# Allegro board PCB_nou.brd
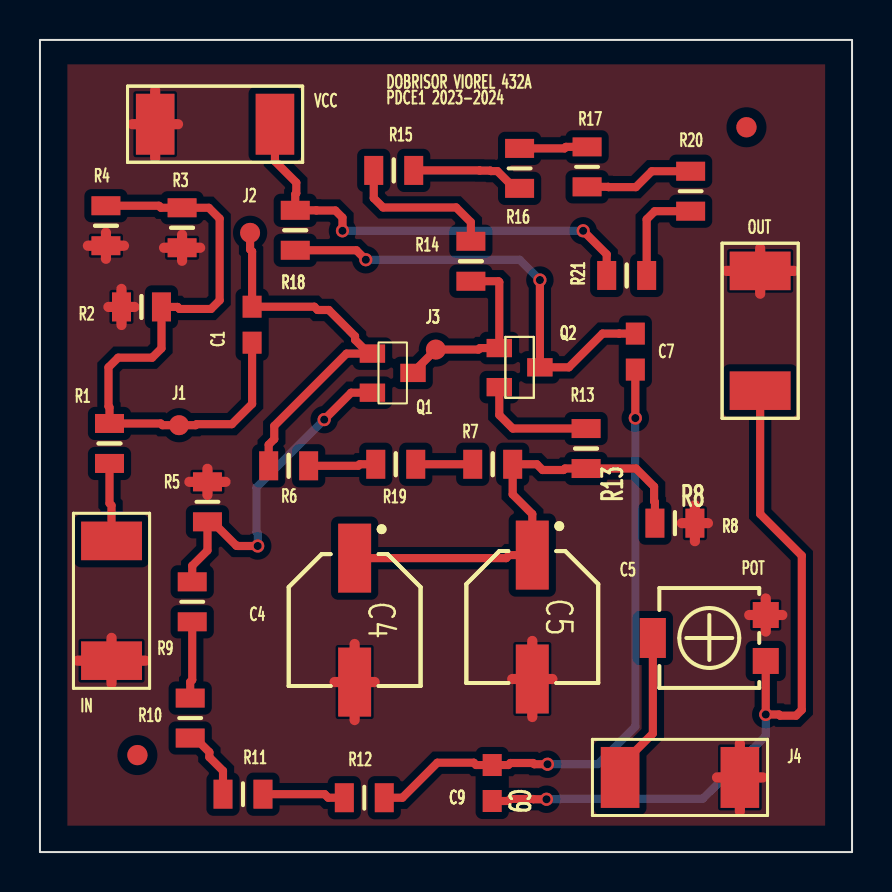
[diagram p0: board, top side]
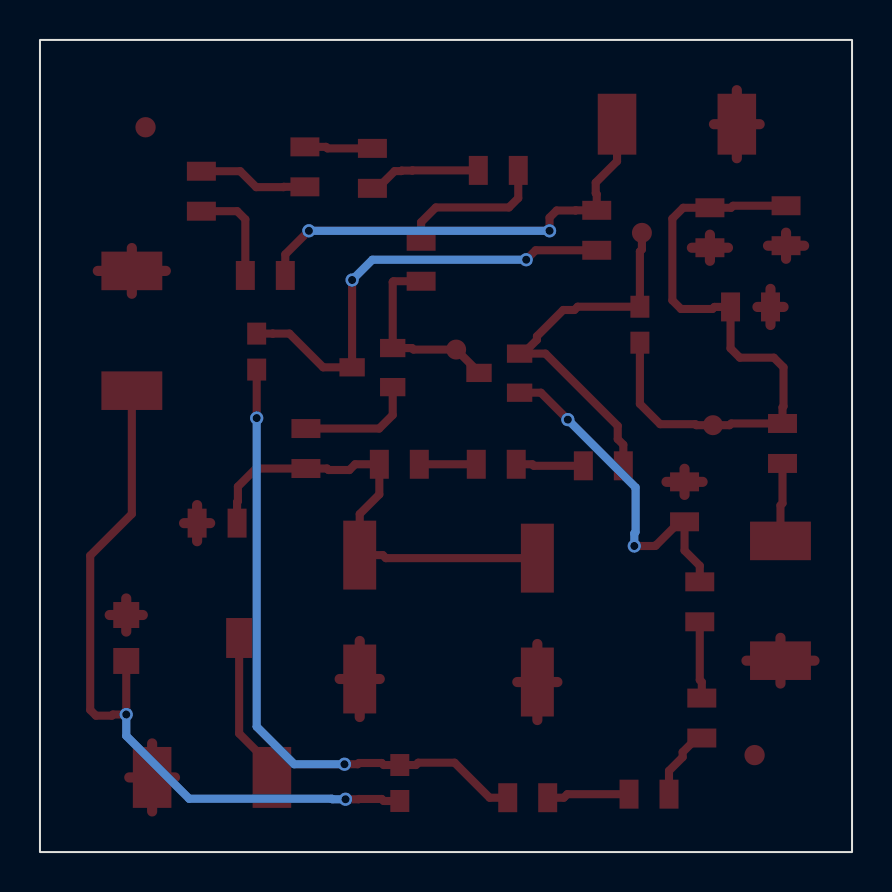
[diagram p1: board, bottom side, seen from below]

Outline 40.64 x 40.64 mm; copper layers: TOP, BOTTOM. Coordinates in mm from the lower left corner of the outline.
Outline path: rectangle 0,0 40.64,40.64

## Design rules (mm)
nets with their own width: min track width 0.406; nets N30981 N30987 N30993 N30999 N31005 N31059 N31085 N31131 N31145 N31155 N31195 N31227 N31257 N31261 N31407 N31419 N31451 N31457 N31481 N31959 N31965 N31971
nets with their own width: min track width 0.508; nets GND

## Placement (name value [footprint] x y rotation side)
C1  4.7u  [CAPC2008X126N_0805]  10.62 26.39 90 top
C4  10u  [CAPAE660X770N]  15.75 11.61 270 top
C5  10u  [CAPAE660X770N]  24.64 11.76 270 top
C7  4.7u  [CAPC2008X126N_0805]  29.79 25.04 90 top
C9  4.7u  [CAPC2008X126N_0805]  22.63 3.45 270 top
IN  CON2  [SMR2512]  3.58 9.58 90 top
J1  CON1  [TP100]  6.96 21.36 0 top
J2  CON1  [TP100]  10.52 30.99 0 top
J3  CON1  [TP100]  19.81 25.15 0 top
J4  CON2  [SMR2512]  29.03 3.73 0 top
NOREF  -  [unnamed]  35.36 36.27 0 top
NOREF#2  -  [unnamed]  4.88 4.85 0 top
OUT  CON2  [SMR2512]  36.04 23.09 90 top
POT  50k  [TS53YL]  36.32 11.86 0 top
Q1  BC846B  [TO236]  16.76 24.94 180 top
Q2  BC846B  [TO236]  23.11 25.22 180 top
R1  1000k  [RES2012X50N_0805]  3.48 20.45 270 top
R2  15k  [RES2012X50N_0805]  5.08 27.28 0 top
R3  100k  [RES2012X50N_0805]  7.11 31.24 90 top
R4  100k  [RES2012X50N_0805]  3.3 31.34 90 top
R5  1k  [RES2012X50N_0805]  8.38 17.53 270 top
R6  330k  [RES2012X50N_0805]  12.45 19.33 0 top
R7  15k  [RES2012X50N_0805]  22.66 19.41 0 top
R8  1k  [RES2012X50N_0805]  31.78 16.46 0 top
R9  100k  [RES2012X50N_0805]  7.62 12.52 270 top
R10  10k  [RES2012X50N_0805]  7.52 6.71 270 top
R11  100k  [RES2012X50N_0805]  10.16 2.9 0 top
R12  10k  [RES2012X50N_0805]  16.23 2.72 0 top
R13  1  [RES2012X50N_0805]  27.33 20.19 90 top
R14  47k  [RES2012X50N_0805]  21.56 29.57 90 top
R15  47k  [RES2012X50N_0805]  17.7 34.11 0 top
R16  47k  [RES2012X50N_0805]  24 34.21 270 top
R17  47k  [RES2012X50N_0805]  27.38 34.29 90 top
R18  15k  [RES2012X50N_0805]  12.78 31.11 90 top
R19  15k  [RES2012X50N_0805]  17.81 19.41 0 top
R20  10k  [RES2012X50N_0805]  32.56 33.07 90 top
R21  2k  [RES2012X50N_0805]  29.36 28.85 0 top
VCC  CON2  [SMR2512]  11.76 36.42 180 top

## Library data of the parts
C1 C4 C5 C7 C9 = C
IN J4 OUT VCC = CON2
J1-J3 = CON1
POT = POT
Q1 Q2 = BC846B
R1-R21 = R

## Footprints (pads in the part's own frame, mm; a bottom-side part is the same pattern mirrored in y, then rotated)
CAPAE660X770N
  rect 3.45x1.65 smd: 1(-3.1,0) 2(3.1,0)
CAPC2008X126N_0805
  rect 1.1x0.95 smd: 1(-0.9,0) 2(0.9,0)
RES2012X50N_0805
  rect 0.95x1.45 smd: 1(-1,0) 2(1,0)
SMR2512
  rect 1.93x3.048 smd: 1(0,0) 2(5.994,0)
TO236
  rect 1.27x0.914 smd: 1(0.127,0) 2(0.127,1.956) 3(-1.905,0.965)
TP100
  round 1 smd: 1(0,0)
TS53YL
  rect 1.3x1.3 smd: 1(0,0) 3(0,-2.3)
  rect 1.3x2 smd: 2(-5.65,-1.15)
unnamed
  round 1.016 smd: (0,0)

## Nets
GND: C4.2 C5.2 IN.1 J4.2 OUT.2 POT.1 R2.1 R3.1 R4.1 R5.1 R8.2 VCC.2
N30981: R15.2 R16.2
N30987: R16.1 R17.2
N30993: R17.1 R20.2
N30999: R20.1 R21.2
N31005: R18.2 R21.1 VCC.1
N31059: R14.2 R15.1
N31085: C7.2 Q2.3 R18.1
N31131: C7.1 C9.1 R12.2
N31145: C9.2 OUT.1 POT.3
N31155: J3.1 Q1.3 Q2.1 R14.1
N31195: Q2.2(E) R13.2
N31227: C1.2 J2.1 Q1.1 R6.1
N31257: Q1.2(E) R5.2 R9.1
N31261: C4.1 C5.1 R7.2 R8.1 R13.1
N31407: IN.2 R1.2
N31419: C1.1 J1.1 R1.1 R2.2 R3.2 R4.2
N31451: R6.2 R19.1
N31457: R7.1 R19.2
N31481: J4.1 POT.2(T)
N31959: R9.2 R10.1
N31965: R10.2 R11.1
N31971: R11.2 R12.1

## Via types
v1: diameter 0.66, hole 0.406, TOP to BOTTOM, 10 vias

## Routing (per net, layer and track width the routed paths; a pad name or vN(x,y) marks a point on that pad's centre or on a via; arc(x,y) is an arc through that point)
GND: length 53.3
  TOP w0.508: VCC.2 6.91,36.42 ; VCC.2 4.62,36.42 ; VCC.2 5.77,38.13 ; VCC.2 5.77,34.72 ; 2.4,30.34 R4.1 ; R4.1 3.3,29.69 ; R4.1 3.3,31 ; R4.1 4.21,30.34 ; 15.75,6.6 C4.2 ; C4.2 14.74,8.51 ; C4.2 16.75,8.51 ; C4.2 15.75,10.41 ; 6.21,30.24 R3.1 ; R3.1 8.02,30.24 ; R3.1 7.11,30.9 ; R3.1 7.11,29.59 ; IN.1 3.58,10.72 ; IN.1 3.58,8.43 ; IN.1 5.28,9.58 ; IN.1 1.88,9.58 ; POT.1 37.15,11.86 ; POT.1 36.32,12.69 ; POT.1 36.32,11.03 ; POT.1 35.49,11.86 ; 32.78,15.56 R8.2 ; R8.2 32.78,17.36 ; R8.2 33.43,16.46 ; R8.2 32.12,16.46 ; R5.1 9.29,18.53 ; R5.1 7.48,18.53 ; R5.1 8.38,19.18 ; R5.1 8.38,17.87 ; R2.1 4.73,27.28 ; R2.1 4.08,26.38 ; R2.1 3.43,27.28 ; R2.1 4.08,28.18 ; J4.2 36.17,3.73 ; J4.2 33.88,3.73 ; J4.2 35.03,5.44 ; J4.2 35.03,2.03 ; OUT.2 37.74,29.08 ; OUT.2 34.34,29.08 ; OUT.2 36.04,27.94 ; OUT.2 36.04,30.23 ; C5.2 25.64,8.66 ; C5.2 23.63,8.66 ; C5.2 24.64,6.76 ; C5.2 24.64,10.56
N30981: length 5.7
  TOP w0.406: R15.2 22,34.11 22.01,34.1 22.54,34.1 22.57,34.08 22.89,34.08 23.75,33.21 R16.2
N30987: length 3.4
  TOP w0.406: R17.2 26.33,35.29 26.25,35.21 R16.1
N30993: length 5.5
  TOP w0.406: R17.1 28.44,33.29 28.45,33.27 29.82,33.27 30.62,34.07 R20.2
N30999: length 5.2
  TOP w0.406: R20.1 30.77,32.07 30.36,31.66 R21.2
N31005: length 22.7
  TOP w0.406: VCC.1 11.76,34.57 12.83,33.5 12.83,32.97 12.78,32.92 R18.2 13.83,32.11 13.84,32.11 14.78,32.11 15.14,31.75 v1(15.14,31.09) ; v1(27.18,31.09) 28.36,29.91 R21.1
  BOTTOM w0.406: v1(27.18,31.09) v1(15.14,31.09)
N31059: length 7.7
  TOP w0.406: R14.2 21.56,31.52 20.83,32.26 17.17,32.26 16.7,32.72 R15.1
N31085: length 22.7
  TOP w0.406: R18.1 15.83,30.12 v1(16.31,29.64) ; C7.2 28.99,25.94 28.99,25.95 28.16,25.95 26.47,24.26 Q2.3 v1(25.02,28.63)
  BOTTOM w0.406: v1(25.02,28.63) 24,29.64 v1(16.31,29.64)
N31131: length 32.1
  TOP w0.406: C7.1 v1(29.79,21.72) ; v1(25.4,4.39) 24.74,4.39 24.68,4.46 23.54,4.46 23.44,4.35 C9.1 21.83,4.35 21.71,4.47 19.89,4.47 18.14,2.72 R12.2
  BOTTOM w0.406: v1(29.79,21.72) 29.79,6.27 27.91,4.39 v1(25.4,4.39)
N31145: length 37.6
  TOP w0.406: C9.2 23.44,2.55 23.54,2.66 24.67,2.66 24.69,2.64 v1(25.35,2.64) ; OUT.1 36.04,16.92 38.13,14.83 38.13,7.11 37.84,6.82 37.04,6.82 36.98,6.88 v1(36.32,6.88) POT.3
  BOTTOM w0.406: v1(25.35,2.64) 26.01,2.64 26.04,2.67 33.17,2.67 36.32,5.82 v1(36.32,6.88)
N31155: length 9.6
  TOP w0.406: R14.1 22.95,28.57 22.99,28.52 Q2.1 22.02,25.22 21.95,25.15 J3.1 18.67,24 Q1.3
N31195: length 6
  TOP w0.406: R13.2 23.66,21.19 22.99,21.87 Q2.2
N31227: length 19.2
  TOP w0.406: 16.46,24.94 15.34,24.94 11.73,21.33 11.73,20.66 11.45,20.38 R6.1 ; 16.46,24.94 Q1.1 ; 16.46,24.94 15.77,25.63 15.77,25.81 14.45,27.13 13.89,27.13 13.73,27.29 C1.2 10.62,30.06 10.52,30.16 J2.1
N31257: length 17.1
  TOP w0.406: Q1.2 15.57,22.99 v1(14.22,21.64) ; R9.1 7.62,14.33 8.38,15.09 R5.2 8.63,16.53 9.83,15.33 9.87,15.33 9.89,15.32 v1(10.9,15.32)
  BOTTOM w0.406: v1(14.22,21.64) 10.83,18.25 10.83,16.01 10.9,15.95 v1(10.9,15.32)
N31261: length 23.4
  TOP w0.406: C4.1 23.33,14.71 23.48,14.86 C5.1 24.64,16.92 23.66,17.9 R7.2 24.87,19.41 25.15,19.12 26.2,19.12 26.28,19.19 R13.1 29.83,19.19 30.73,18.29 30.73,17.56 30.78,17.51 R8.1
N31407: length 3.9
  TOP w0.406: IN.2 3.58,17.35 3.48,17.45 R1.2
N31419: length 31.8
  TOP w0.406: C1.1 10.62,22.43 9.6,21.41 7.84,21.41 7.79,21.36 J1.1 6.13,21.36 6.04,21.45 R1.1 3.48,22.25 3.43,22.3 3.43,24.26 3.91,24.74 5.61,24.74 6.08,25.21 R2.2 6.89,27.28 6.99,27.18 8.56,27.18 8.99,27.61 8.99,31.7 8.45,32.24 R3.2 6.06,32.24 5.96,32.34 R4.2
N31451: length 3.4
  TOP w0.406: R6.2 15.92,19.33 16,19.41 R19.1
N31457: length 2.9
  TOP w0.406: R19.2 R7.1
N31481: length 7.7
  TOP w0.406: POT.2 30.67,5.93 29.03,4.29 J4.1
N31959: length 3.9
  TOP w0.406: R9.2 7.62,8.61 7.52,8.51 R10.1
N31965: length 3.6
  TOP w0.406: R10.2 7.77,5.71 8.48,5 8.48,4.75 9.16,4.06 R11.1
N31971: length 4.1
  TOP w0.406: R12.1 14.43,2.72 14.25,2.9 R11.2

## Copper pours and planes (outline as drawn; the poured copper is in the pictures)
GND on TOP: 1.37,1.32 1.37,39.42 39.29,39.42 39.29,1.32

## Text on the board
Ref Des/Silkscreen Top: R1 | C4 | DOBRISOR VIOREL 432A | PDCE1 2023-2024 | C5 | J4
XSECTION_CHART: *  SURFACE | L1 TOP CONDUCTOR | *  DIELECTRIC | L2 BOTTOM CONDUCTOR | DESIGN CROSS SECTION CHART | ___________________________ | TOTAL THICKNESS 64 MIL | 1-2
DISPLAY_TOP: FIGURE | FINISHED_SIZE | 16.0 | DRILL CHART: TOP to BOTTOM | ALL UNITS ARE IN MILS | PLATED | QTY | 12
